# EAGLE board fiddle (EAGLE 7.3.0)
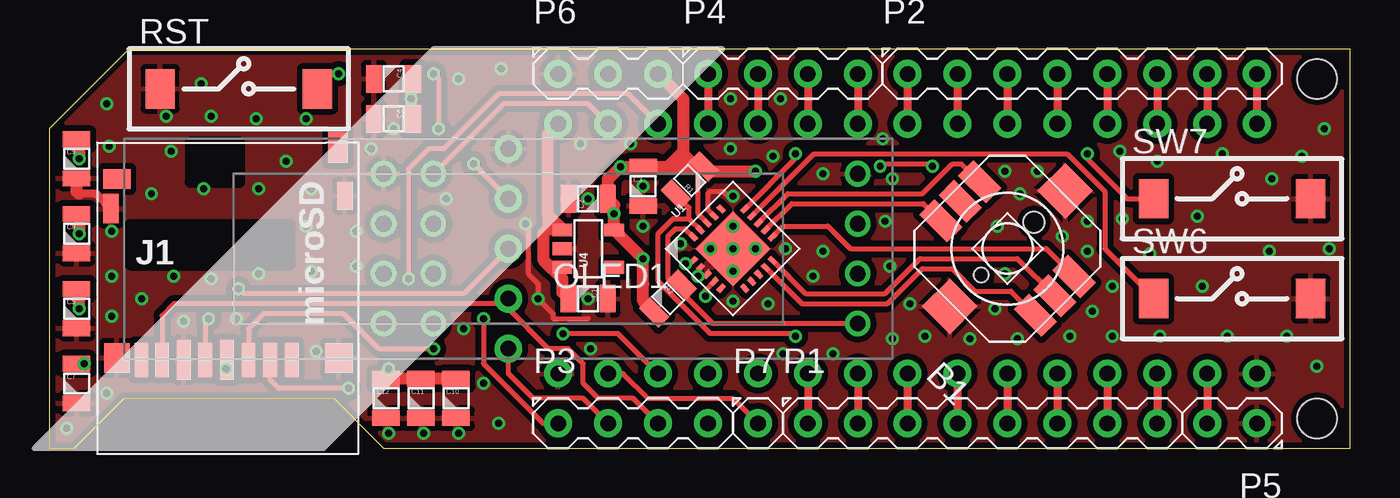
[diagram p0: board, top side]
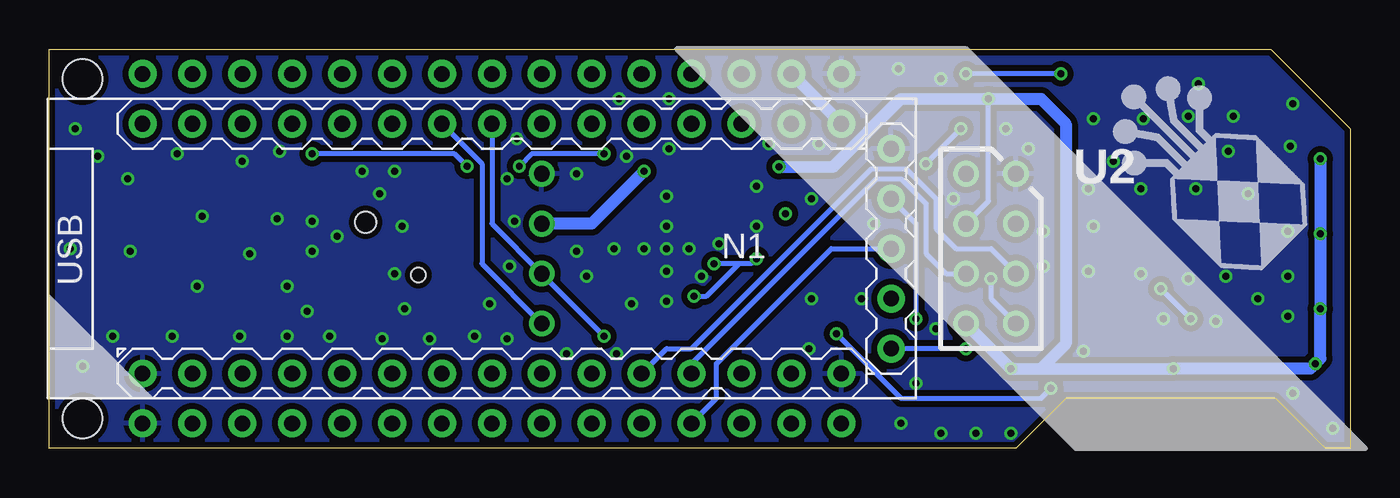
[diagram p1: board, bottom side, seen from below]

Size 66.22 x 20.31 mm. Coordinates in mm from the lower left corner, seen from the top.
Outline: 0,0 1.27,0 3.81,2.54 14.48,2.54 17.02,0 66.22,0 66.22,20.31 4.05,20.31 0,16.26 0,0
Copper layers (1*16): Top 0.035mm / dielectric 1.5mm / Bottom 0.035mm
Design rules "dooba": minimum track width 6mil, minimum drill 12mil, track to track 6mil, track to pad 6mil, pad to pad 6mil, via to via 6mil, smd to smd 0mil, copper to edge 10mil, drill to drill 10mil, minimum pad ring 10mil, minimum via ring 6mil, stop-mask expansion 2mil, vias tented up to drill 25mil, thermal gap 10mil
Holes 2 mm at 64.52,1.52 64.52,18.8

## Footprints (pad centres in the part's own frame; a part is rotated, then mirrored left to right if it is on the bottom)
TACTSW-5WAY-7X7 = smd 2 x 1.1: 1 -3.4,1.4; 2 -3.4,0; 3 -3.4,-1.4; 4 3.4,1.4; 5 3.4,0; 6 3.4,-1.4 | smd 2 x 2: GND1 0,4.15; GND2 0,-4.15 | hole 0.75: 0,1.9 | hole 1.05: 0,-1.9
0805 = smd 0.8 x 1.4: 1 -1,0; 2 1,0
DM3D-SF = smd 0.7 x 1.75: CLK/SCK -1.2,-1.34; CMD/DI 1,-1.34; DAT0/DO -3.4,-1.34; DAT1 -4.45,-1.34; DAT2 3.2,-1.34; DAT3/CS 2.1,-1.34 | smd 0.8 x 1.5: GND1 -6,6.36 | smd 0.8 x 1.4: GND2 5.9,7.01 | smd 1.4 x 1.5: GND3 5.6,-1.24 | smd 1.3 x 1.5: GND4 -5.7,-1.24 | smd 1 x 1.55: SW_A 5.55,9.46 | smd 1.4 x 1: SW_B -5.7,7.86 | smd 0.7 x 2.032: VDD -0.1,-1.34; VSS -2.3,-1.34
DOOBA_IONODE = drill 0.8 pad 1.422: 1 16.51,6.35; 2 13.97,6.35; 3 11.43,6.35; 4 8.89,6.35; 5 6.35,6.35; 6 3.81,6.35; 7 1.27,6.35; 8 -1.27,6.35; 9 -3.81,6.35; 10 -6.35,6.35; 11 -8.89,6.35; 12 -11.43,6.35; 13 -13.97,6.35; 14 -16.51,6.35; 15 -19.05,6.35; 16 -19.05,-6.35; 17 -16.51,-6.35; 18 -13.97,-6.35; 19 -11.43,-6.35; 20 -8.89,-6.35; 21 -6.35,-6.35; 22 -3.81,-6.35; 23 -1.27,-6.35; 24 1.27,-6.35; 25 3.81,-6.35; 26 6.35,-6.35; 27 8.89,-6.35; 28 11.43,-6.35; 29 13.97,-6.35; 30 16.51,-6.35; 31 -21.59,5.08; 32 -21.59,2.54; 33 -21.59,0; 34 -21.59,-2.54; 35 -21.59,-5.08
I2C-OLED-0.91 = drill 0.8: GND -17.78,-3.81; SCL -17.78,1.27; SDA -17.78,3.81; VCC -17.78,-1.27
PIN_8 = drill 0.8 pad 1.422: 1 -8.89,0; 2 -6.35,0; 3 -3.81,0; 4 -1.27,0; 5 1.27,0; 6 3.81,0; 7 6.35,0; 8 8.89,0
PIN_4 = drill 0.8 pad 1.422: 1 -3.81,0; 2 -1.27,0; 3 1.27,0; 4 3.81,0
PIN_2 = drill 0.8 pad 1.422: 1 -1.27,0; 2 1.27,0
PIN_3 = drill 0.8 pad 1.422: 1 -2.54,0; 2 0,0; 3 2.54,0
PIN_1 = drill 0.8 pad 1.422: 1 0,0
TACTSW_MICRO3X6 = smd 1.5 x 2: 1 -4,0; 2 4,0
20-VQFN = smd 0.45 x 0.26: 1 -1.85,1; 2 -1.85,0.5; 3 -1.85,0; 4 -1.85,-0.5; 5 -1.85,-1; 11 1.85,-1; 12 1.85,-0.5; 13 1.85,0; 14 1.85,0.5; 15 1.85,1 | smd 0.26 x 0.45: 6 -1,-1.85; 7 -0.5,-1.85; 8 0,-1.85; 9 0.5,-1.85; 10 1,-1.85; 16 1,1.85; 17 0.5,1.85; 18 0,1.85; 19 -0.5,1.85; 20 -1,1.85 | smd 2.7 x 2.7: PAD 0,0
WRL-13678-QUIET = drill 0.8: 1 -8.89,3.81; 2 -11.43,3.81; 3 -8.89,1.27; 4 -11.43,1.27; 5 -8.89,-1.27; 6 -11.43,-1.27; 7 -8.89,-3.81; 8 -11.43,-3.81
SOT23-5 = smd 0.66 x 1: 1 0.95,1.315; 2 0,1.315; 3 -0.95,1.315; 4 -0.95,-1.315; 5 0.95,-1.315

## Placement (x,y rotation side)
B1  TACTSW_5WAYSMD-7X7  [TACTSW-5WAY-7X7]  48.77,10.16 135 top
C1  1uF  [0805]  27.43,7.62 180 top
C2  1uF  [0805]  27.43,12.7 0 top
C3  100nF  [0805]  30.23,13.33 270 top
C4  10uF  [0805]  17.53,18.8 180 top
C5  10uF  [0805]  1.4,7.11 270 top
C6  100nF  [0805]  17.53,16.76 180 top
C7  100nF  [0805]  1.4,3.3 270 top
C8  10uF  [0805]  1.4,10.92 270 top
C9  10uF  [0805]  1.4,14.73 270 top
C10  10uF  [0805]  20.7,2.54 270 top
C11  10uF  [0805]  18.92,2.54 270 top
C12  10uF  [0805]  17.14,2.54 270 top
J1  DM3D-SFDM  [DM3D-SF]  9.14,5.84 0 top
N1  DOOBA_IONODE  [DOOBA_IONODE]  44.96,10.16 180 bottom
OLED1  I2C-OLED-0.91  [I2C-OLED-0.91]  23.37,10.16 180 top
P1  PIN_8  [PIN_8]  47.5,1.27 0 top
P2  PIN_8  [PIN_8]  52.58,19.05 0 top
P3  PIN_4  [PIN_4]  29.72,1.27 0 top
P4  PIN_4  [PIN_4]  37.34,19.05 0 top
P5  PIN_2  [PIN_2]  60.2,1.27 180 top
P6  PIN_3  [PIN_3]  28.45,19.05 0 top
P7  PIN_1  [PIN_1]  36.07,1.27 0 top
R1  10k  [0805]  32.6,13.63 45 top
R2  10k  [0805]  31.5,7.62 225 top
RST  TACTSW_2MICRO3X6  [TACTSW_MICRO3X6]  9.65,18.29 0 top
SW6  TACTSW_2MICRO3X6  [TACTSW_MICRO3X6]  60.2,7.62 0 top
SW7  TACTSW_2MICRO3X6  [TACTSW_MICRO3X6]  60.2,12.7 0 top
U1  MCP23008QFN  [20-VQFN]  34.8,10.16 45 top
U2  WRL-13678WRL-13678-QUIET  [WRL-13678-QUIET]  8.13,10.16 0 bottom
U4  3.3V 600mA  [SOT23-5]  27.43,10.16 90 top

## Library data of the parts
B1 C1-C12 J1 N1 OLED1 P1-P7 R1 R2 RST SW6 SW7 U1 U2 U4 = dooba

## Nets
3.3V: C2.2 C3.1 C4.1 C5.1 C6.1 C7.1 C8.1 C9.1 C10.1 C11.1 C12.1 J1.VDD OLED1.VCC P6.3 R1.2 R2.2 U1.1 U1.4 U1.18 U2.4 U2.8 U4.5
GND: B1.5 B1.GND1 B1.GND2 C1.1 C2.1 C3.2 C4.2 C5.2 C6.2 C7.2 C8.2 C9.2 C10.2 C11.2 C12.2 J1.GND1 J1.GND2 J1.GND3 J1.GND4 J1.VSS N1.1 N1.15 N1.35 OLED1.GND P5.1 P6.1 RST.1 SW6.2 SW7.2 U1.2 U1.3 U1.17 U1.PAD U2.1 U4.2
I2C_SCL: N1.23 OLED1.SCL P2.1 R1.1 U1.19
I2C_SDA: N1.24 OLED1.SDA P2.2 R2.1 U1.20
MICROSD_CS: J1.DAT3/CS N1.13
N$1: B1.1 U1.9
N$2: B1.2 U1.10
N$3: B1.3 U1.11
N$4: B1.6 U1.13
N$5: B1.4 U1.12
N$6: SW6.1 U1.14
N$7: SW7.1 U1.15
N$8: N1.34 P3.1 RST.2
N$9: N1.30 P2.8
N$10: N1.29 P2.7
N$11: N1.28 P2.6
N$12: N1.27 P2.5
N$13: N1.26 P2.4
N$14: N1.25 P2.3
N$15: N1.3 P1.8
N$16: N1.4 P1.7
N$17: N1.5 P1.6
N$18: N1.6 P1.5
N$19: N1.7 P1.4
N$20: N1.8 P1.3
N$21: N1.9 P1.2
N$22: N1.10 P1.1
N$23: N1.22 P4.4
N$24: N1.21 P4.3
N$25: N1.20 P4.2
N$26: N1.19 P4.1
N$27: N1.14 P7.1
SPI_MISO: J1.DAT0/DO N1.32 P3.3
SPI_MOSI: J1.CMD/DI N1.31 P3.2
SPI_SCK: J1.CLK/SCK N1.33 P3.4
VIN: C1.2 N1.16 P6.2 U4.1 U4.3
VUSB: N1.2 P5.2
WIFI_FLASH: N1.11 U2.5
WIFI_RST: N1.12 U2.6
WIFI_RX: N1.17 U2.2
WIFI_TX: N1.18 U2.7

## Tracks (layer width: path | path; a pad name or v marks a point on that pad's centre or on a via)
3.3V  (via drill 0.36)
  Top 0.254: U1.18 33.02,11.94 33.02,14.04 R1.2 | U1.1 32.62,9.4 v32.38,9.4 | U1.4 33.4,8.06 v33.4,7.75
  Top 0.61: 31.5,14.33 C3.1 v29.07,14.33 28.43,13.7 C2.2 28.75,12.39 v28.75,11.93 U4.5 v30.21,9.64 30.23,8.36 30.23,7.49 30.79,6.93 R2.2 | 31.5,14.33 R1.2 33.64,14.08 33.66,14.1 v35.94,14.1 | J1.VDD 9.04,3.84 v9.02,4.06 | C6.1 18.41,16.87 v18.41,17.78 18.41,18.68 C4.1 | C10.1 C11.1 C12.1 17.02,3.67 v17.27,4.06 | 32.26,15.1 32.26,17.78 P6.3 | 32.26,15.1 31.5,14.33 | 32.26,15.1 32.26,14.99 32.77,14.48 | C7.1 1.41,4.32 v1.78,4.32 | v1.52,7.11 1.52,7.99 C5.1 | C8.1 1.52,11.79 v1.52,10.92 | C9.1 1.52,15.61 v1.52,14.73
  Bottom 0.254: v30.21,9.64 30.48,9.4 31.12,9.4 | 31.12,9.4 v32.38,9.4 | v33.4,7.75 32.77,7.75 31.12,9.4 | U2.4 18.41,12.57 v18.41,17.78
  Bottom 0.61: v35.94,14.1 38.61,11.43 OLED1.VCC | U2.8 v17.27,4.06 15.75,4.06 | 15.75,4.06 v9.02,4.06 2.03,4.06 v1.78,4.32 1.52,4.57 v1.52,7.11 v1.52,10.92 v1.52,14.73 | 15.75,4.06 14.48,5.33 14.48,16.51 15.75,17.78 v18.41,17.78 22.86,17.78 26.3,14.33 v29.07,14.33
GND  (via drill 0.36)
  Top 0.254: U1.3 33.4,8.76 v33.02,8.76 | U1.17 33.53,12.14 33.53,12.95 33.66,13.08 34.29,13.08 34.54,12.83 v34.8,12.83 | v24.26,11.43 24.38,11.3 24.38,8.89 24.89,8.38 v24.89,7.62 25.65,6.86 25.65,6.6 27.43,6.6
  Top 0.406: J1.GND1 2.39,12.95 1.52,12.95
  Top 0.61: 1.52,12.95 1.4,13.08 C9.2
  Bottom 0.254: v33.02,8.76 32.89,8.64
  other vias: 34.8,9.02 35.94,10.16 34.8,11.3 33.66,10.16 34.8,10.16 32.13,10.41 34.8,7.49 37.46,10.16 36.58,7.37 39.37,10.03 38.86,8.76 27.43,7.62 30.23,11.3 27.43,12.7 36.83,14.86 39.37,13.97 42.55,11.56 42.8,9.27 43.82,7.37 42.93,5.59 39.88,4.83 37.34,4.83 48.13,7.11 46.86,5.59 49.28,5.59 51.94,5.71 48.64,8.89 48.26,11.3 49.4,12.95 51.56,10.79 52.83,11.56 50.29,14.1 48.64,14.1 52.83,10.03 54.1,8.25 53.09,6.99 54.1,5.71 54.61,11.68 56.01,9.91 56.51,5.71 59.94,5.71 58.67,8.25 62.1,10.03 58.42,11.81 62.99,5.71 62.23,13.72 56.39,14.61 65.15,10.16 64.52,4.19 63.75,14.86 64.9,16.26 42.93,13.72 42.42,15.75 54.48,15.11 59.69,14.99 44.58,5.71 6.86,6.48 13.59,4.95 15.62,9.27 13.34,9.02 13.08,11.3 15.62,11.05 27.05,15.49 30.23,13.33 20.83,18.8 17.53,16.26 10.67,8.89 8.25,8.64 7.87,13.21 10.67,13.21 13.34,13.21 12.06,14.61 10.54,16.76 13.08,16.76 6.22,15.11 5.97,16.89 8.25,16.89 3.18,6.73 3.18,11.05 3.18,8.76 4.7,7.62 6.35,8.76 5.21,12.95 9.52,6.6 3.05,15.37 17.27,0.76 19.05,0.76 20.83,0.76 22.86,1.27 22.1,3.3 21.08,6.1 2.92,2.79 0.89,1.02 2.92,17.53 7.75,18.54 22.99,19.3 20.19,12.7 16.38,15.24 27.56,5.08 29.59,15.49 34.67,15.24 34.67,17.78 37.21,17.78
  pour Bottom (isolate 0.305): 0,0 0,16.26 4.06,20.32 66.55,20.32 66.55,0
  pour Top (isolate 0.305): 0,0 0,16.26 4.06,20.32 66.55,20.32 66.55,0
I2C_SCL  (via drill 0.36)
  Top 0.254: 32.57,11.68 31.75,11.68 30.99,10.92 30.99,8.51 33.66,5.84 37.85,5.84 v37.97,5.71 | 32.57,11.68 U1.19 | 32.57,11.68 32.57,12.25 R1.1
  Top 0.406: P2.1 N1.23
  Bottom 0.254: v37.97,5.71 OLED1.SCL 43.69,11.43 N1.23
I2C_SDA
  Top 0.254: OLED1.SDA 33.78,6.35 31.5,8.64 | 31.5,8.64 31.5,10.79 31.88,11.18 32.37,11.18 U1.20 | 31.5,8.64 31.89,8.64 R2.1
  Top 0.406: P2.2 N1.24
  Bottom 0.254: N1.24 44.2,14.48 44.2,9.4 OLED1.SDA
MICROSD_CS  (via drill 0.36)
  Top 0.254: N1.13 28.96,5.84 v26.16,5.84 | v15.24,3.05 11.68,3.05 11.24,3.49 J1.DAT3/CS
  Bottom 0.254: v26.16,5.84 22.86,2.54 15.75,2.54 v15.24,3.05
N$1
  Top 0.254: U1.9 38.3,7.37 42.67,7.37 44.45,9.14 45.97,9.14 47.12,8 48.95,8 B1.1
N$2
  Top 0.254: B1.2 49.28,9.65 44.32,9.65 42.55,7.87 38.5,7.87 U1.10
N$3
  Top 0.254: U1.11 37.35,11.3 39.62,11.3 40.77,10.16 50.75,10.16 B1.3
N$4
  Top 0.254: B1.6 46.43,14.48 45.97,14.48 44.45,12.95 37.59,12.95 U1.13
N$5
  Top 0.254: B1.4 44.5,12.45 37.79,12.45 U1.12
N$6
  Top 0.254: U1.14 38.92,14.99 51.82,14.99 53.72,13.08 53.72,10.16 56.2,7.68 SW6.1
N$7  (via drill 0.36)
  Top 0.254: U1.15 37.97,14.75 v37.97,14.99 | v52.83,14.99 52.83,14.73 54.86,12.7 SW7.1 | v42.29,14.35 42.42,14.48 44.83,14.48 v44.96,14.35
  Bottom 0.254: v37.97,14.99 41.66,14.99 v42.29,14.35 | v44.96,14.35 45.59,14.99 v52.83,14.99
N$8  (via drill 0.36)
  Top 0.254: v22.1,6.6 22.1,4.32 25.15,1.27 P3.1 | RST.2 14.41,19.05 v14.73,19.05 | v19.56,19.05 19.81,18.8 v19.81,16.26 | v21.59,14.48 N1.34
  Bottom 0.254: N1.34 22.1,11.43 v22.1,6.6 | v14.73,19.05 v19.56,19.05 | v19.81,16.26 v21.59,14.48
N$9
  Top 0.406: P2.8 N1.30
N$10
  Top 0.406: P2.7 N1.29
N$11
  Top 0.406: P2.6 N1.28
N$12
  Top 0.406: P2.5 N1.27
N$13
  Top 0.406: P2.4 N1.26
N$14
  Top 0.406: P2.3 N1.25
N$15
  Top 0.406: N1.3 P1.8
N$16
  Top 0.406: N1.4 P1.7
N$17
  Top 0.406: N1.5 P1.6
N$18
  Top 0.406: N1.6 P1.5
N$19
  Top 0.406: N1.7 P1.4
N$20
  Top 0.406: N1.8 P1.3
N$21
  Top 0.406: N1.9 P1.2
N$22
  Top 0.406: N1.10 P1.1
N$23
  Top 0.406: P4.4 N1.22
N$24
  Top 0.406: P4.3 N1.21
N$25
  Top 0.406: P4.2 N1.20
N$26
  Top 0.406: P4.1 N1.19
N$27
  Top 0.254: N1.14 29.21,3.81 30.48,2.54 34.8,2.54 P7.1
SPI_MISO
  Top 0.254: J1.DAT0/DO 5.74,6.76 6.35,7.37 23.11,7.37 N1.32 23.37,7.11 25.4,5.08 26.42,5.08 27.18,4.32 27.18,3.3 27.94,2.54 29.72,2.54 P3.3
SPI_MOSI  (via drill 0.36)
  Top 0.254: J1.CMD/DI 10.14,6.08 10.92,6.86 14.99,6.86 16.76,5.08 v19.56,5.08 | P3.2 27.18,2.54 24.64,2.54 23.37,3.81 N1.31
  Bottom 0.254: v19.56,5.08 N1.31
SPI_SCK  (via drill 0.36)
  Top 0.254: v8.13,6.6 7.94,6.42 J1.CLK/SCK | N1.33 21.08,7.87 9.91,7.87 v9.65,8.13
  Bottom 0.254: v9.65,8.13 v8.13,6.6 | P3.4 32.26,2.54 32.26,4.32 26.42,10.16 N1.33
VIN
  Top 0.406: U4.3 26.12,8.64
  Top 0.61: C1.2 26.12,7.93 26.12,8.64 25.15,9.61 25.15,10.92 25.33,11.11 | 25.33,11.11 U4.1 25.4,11.83 | 25.4,11.83 25.4,16 N1.16 | 25.4,11.83 25.4,11.18 25.33,11.11
  Bottom 0.61: P6.2 N1.16
VUSB
  Top 0.406: N1.2 P5.2
WIFI_FLASH
  Bottom 0.254: N1.11 34.8,5.08 33.53,5.08 24.38,14.22 22.61,14.22 21.08,12.7 21.08,11.18 20.07,10.16 18.29,10.16 U2.5
WIFI_RST
  Bottom 0.254: N1.12 33.53,4.32 24.13,13.72 22.86,13.72 21.59,12.45 21.59,9.91 20.57,8.89 U2.6
WIFI_RX
  Top 0.254: N1.17 27.43,17.53 23.11,17.53 U2.2
WIFI_TX  (via drill 0.36)
  Top 0.254: v18.29,8.64 18.29,14.22 19.3,15.24 20.07,15.24 22.86,18.03 29.46,18.03 N1.18
  Bottom 0.254: v18.29,8.64 18.29,7.62 U2.7